# Altium PCB Ender-3.PcbDoc (part 13 of 14)
Units mil, origin at the board's own origin, x right, y up, seen from the top; angles counter-clockwise.
Board outline 3970.48 x 2769.68 mil, 2 copper layers (TopLayer, BottomLayer); 146 components, 136 nets, 669 pads, 614 vias.
Unrouted connection lines stored in the file: 1.
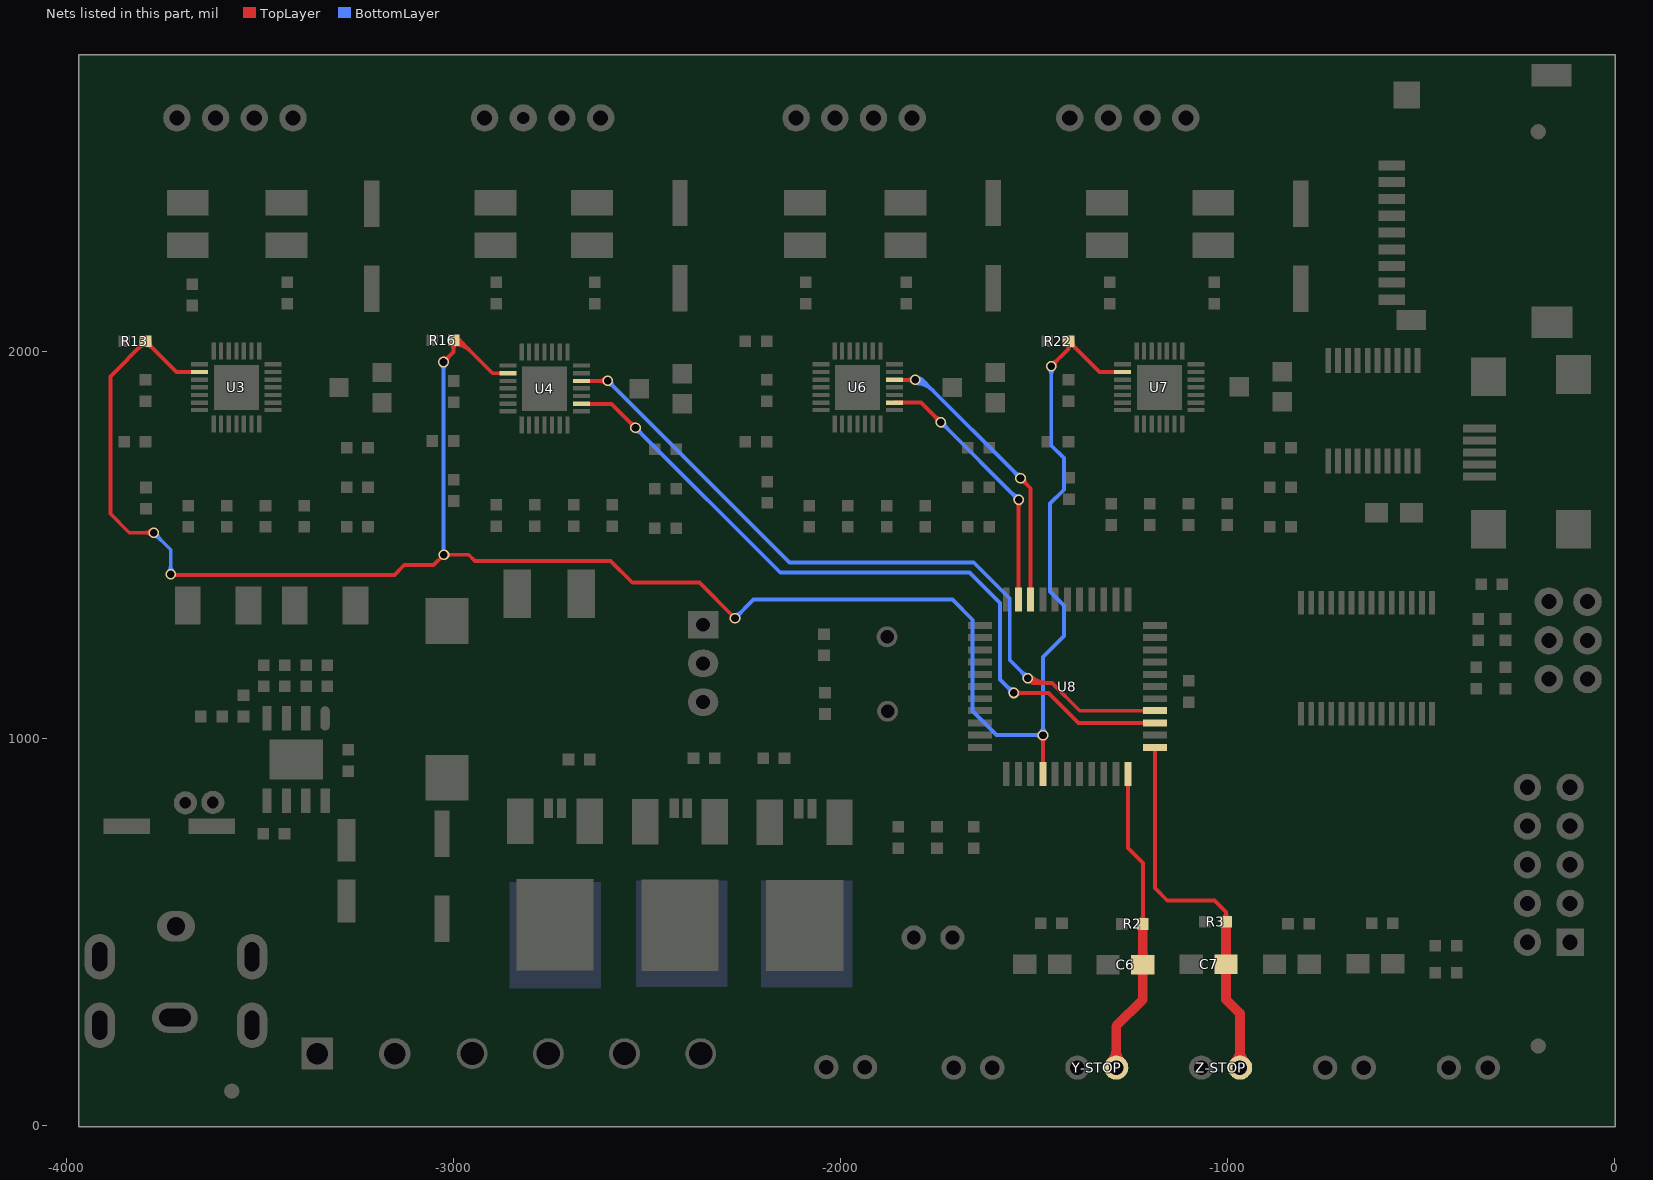
[diagram p13: the nets of this part, all layers, seen from the top]

## Via types
v1: diameter 28, hole 18, TopLayer to BottomLayer, tented both sides, 246 vias
v2: diameter 27.56, hole 19.68, TopLayer to BottomLayer, tented both sides, 196 vias
v3: diameter 20, hole 12, TopLayer to BottomLayer, tented both sides, 124 vias
v4: diameter 27.56, hole 11.81, TopLayer to BottomLayer, tented bottom, 16 vias
v5: diameter 27.56, hole 19.68, TopLayer to BottomLayer, 16 vias
v6: diameter 20, hole 12, TopLayer to BottomLayer, 12 vias
v7: diameter 28, hole 11.81, TopLayer to BottomLayer, tented both sides, 4 vias

## Nets (pads, with @x,y where several pads share a name; then routed paths per layer and width w, separated by ;. In a path a pad name is that pad's centre, name@x,y a point inside that pad or via, vN(x,y) a via of type N, cw(c..) or ccw(c..) an arc to the next point about the centre after c; other vN are vias at no path point) (continued)
XYEENABLE: R13.1 R16.1 R22.1 U3.2 U4.2 U7.2 U8.15 | length 10655.1
  TopLayer w10: v2(-3774.54,1532.84) -3837.54,1532.84 -3886.54,1581.84 -3886.54,1936.97 R13.1@-3795.62,2027.88 -3715.62,1947.88 U3.2@-3655.62,1947.88 ; v2@-3730.54,1424 -3152,1424 -3127.01,1448.99 -3051.39,1448.99 v2(-3024.54,1475.84) -2960.54,1475.84 -2944.69,1460 -2594,1460 -2537.84,1403.84 -2364.54,1403.84 v2(-2272.54,1311.84) ; v2(-3025.54,1973.84) -2999.54,1999.84 R16.1@-2999.54,2029.84 ; R16.1@-2992.9,2022.36 cw(c-2984.49,2012.89) -2975.54,2021.84 ; -2983.04,2029.35 ccw(c-2991.55,2020.84) R16.1@-2999.54,2029.84 ; U4.2@-2859.54,1944.84 -2898.54,1944.84 -2983.54,2029.84 ; U8.15@-1476.54,908.84 v2(-1476.54,1009.84) ; v2(-1455.23,1963.14) -1410.62,2007.76 ; U7.2@-1270.62,1947.88 -1330.62,1947.88 R22.1@-1410.62,2027.88 -1410.62,2007.76 ; -3812.69,2010.81 cw(c-3795.62,1993.74) R13.1@-3795.62,2017.88 ; -3812.69,2010.81 ccw(c-3829.76,2027.88) R13.1@-3805.62,2027.88 ; -3812.69,2010.81 cw(c-3795.62,1993.74) R13.1@-3795.62,2017.88 ; -3812.69,2010.81 ccw(c-3829.76,2027.88) R13.1@-3805.62,2027.88 ; -3812.69,2010.81 cw(c-3795.62,1993.74) R13.1@-3795.62,2017.88 ; -3812.69,2010.81 ccw(c-3829.76,2027.88) R13.1@-3805.62,2027.88 ; -3812.69,2010.81 cw(c-3795.62,1993.74) R13.1@-3795.62,2017.88 ; -3812.69,2010.81 ccw(c-3829.76,2027.88) R13.1@-3805.62,2027.88 ; -3812.69,2010.81 cw(c-3795.62,1993.74) R13.1@-3795.62,2017.88 ; -3812.69,2010.81 ccw(c-3829.76,2027.88) R13.1@-3805.62,2027.88 ; -3812.69,2010.81 ccw(c-3829.76,2027.88) R13.1@-3805.62,2027.88 ; -3812.69,2010.81 cw(c-3795.62,1993.74) R13.1@-3795.62,2017.88 ; -3812.69,2010.81 ccw(c-3829.76,2027.88) R13.1@-3805.62,2027.88 ; -3812.69,2010.81 cw(c-3795.62,1993.74) R13.1@-3795.62,2017.88 ; -3812.69,2010.81 ccw(c-3829.76,2027.88) R13.1@-3805.62,2027.88 ; -3812.69,2010.81 cw(c-3795.62,1993.74) R13.1@-3795.62,2017.88 ; -3812.69,2010.81 ccw(c-3829.76,2027.88) R13.1@-3805.62,2027.88 ; -3812.69,2010.81 cw(c-3795.62,1993.74) R13.1@-3795.62,2017.88 ; -3795.73,1532.84 cw(c-3795.73,1511.65) v2@-3780.74,1526.63 ; -3795.73,1532.84 ccw(c-3795.73,1554.04) v2@-3780.74,1539.05 ; -3795.73,1532.84 cw(c-3795.73,1511.65) v2@-3780.74,1526.63 ; -3795.73,1532.84 ccw(c-3795.73,1554.04) v2@-3780.74,1539.05 ; -3795.73,1532.84 cw(c-3795.73,1511.65) v2@-3780.74,1526.63 ; -3795.73,1532.84 ccw(c-3795.73,1554.04) v2@-3780.74,1539.05 ; -3795.73,1532.84 cw(c-3795.73,1511.65) v2@-3780.74,1526.63 ; -3795.73,1532.84 ccw(c-3795.73,1554.04) v2@-3780.74,1539.05 ; -3795.73,1532.84 cw(c-3795.73,1511.65) v2@-3780.74,1526.63 ; -3795.73,1532.84 ccw(c-3795.73,1554.04) v2@-3780.74,1539.05 ; -3795.73,1532.84 ccw(c-3795.73,1554.04) v2@-3780.74,1539.05 ; -3795.73,1532.84 cw(c-3795.73,1511.65) v2@-3780.74,1526.63 ; -3795.73,1532.84 ccw(c-3795.73,1554.04) v2@-3780.74,1539.05 ; -3795.73,1532.84 cw(c-3795.73,1511.65) v2@-3780.74,1526.63 ; -3795.73,1532.84 ccw(c-3795.73,1554.04) v2@-3780.74,1539.05 ; -3795.73,1532.84 cw(c-3795.73,1511.65) v2@-3780.74,1526.63 ; -3795.73,1532.84 ccw(c-3795.73,1554.04) v2@-3780.74,1539.05 ; -3795.73,1532.84 cw(c-3795.73,1511.65) v2@-3780.74,1526.63 ; R13.1@-3795.62,2017.88 cw(c-3795.62,1993.74) -3778.55,2010.81 ; R13.1@-3795.62,2017.88 cw(c-3795.62,1993.74) -3778.55,2010.81 ; R13.1@-3795.62,2017.88 cw(c-3795.62,1993.74) -3778.55,2010.81 ; R13.1@-3795.62,2017.88 cw(c-3795.62,1993.74) -3778.55,2010.81 ; R13.1@-3795.62,2017.88 cw(c-3795.62,1993.74) -3778.55,2010.81 ; R13.1@-3795.62,2017.88 cw(c-3795.62,1993.74) -3778.55,2010.81 ; R13.1@-3795.62,2017.88 cw(c-3795.62,1993.74) -3778.55,2010.81 ; R13.1@-3795.62,2017.88 cw(c-3795.62,1993.74) -3778.55,2010.81 ; R13.1@-3795.62,2017.88 cw(c-3795.62,1993.74) -3778.55,2010.81 ; R13.1@-3785.62,2027.88 ccw(c-3761.48,2027.88) -3778.55,2010.81 ; R13.1@-3785.62,2027.88 ccw(c-3761.48,2027.88) -3778.55,2010.81 ; R13.1@-3785.62,2027.88 ccw(c-3761.48,2027.88) -3778.55,2010.81 ; R13.1@-3785.62,2027.88 ccw(c-3761.48,2027.88) -3778.55,2010.81 ; R13.1@-3785.62,2027.88 ccw(c-3761.48,2027.88) -3778.55,2010.81 ; R13.1@-3785.62,2027.88 ccw(c-3761.48,2027.88) -3778.55,2010.81 ; R13.1@-3785.62,2027.88 ccw(c-3761.48,2027.88) -3778.55,2010.81 ; R13.1@-3785.62,2027.88 ccw(c-3761.48,2027.88) -3778.55,2010.81 ; R13.1@-3785.62,2027.88 ccw(c-3761.48,2027.88) -3778.55,2010.81 ; v2@-3025.54,1982.62 ccw(c-3025.54,2003.82) -3010.55,1988.83 ; v2@-3025.54,1982.62 ccw(c-3025.54,2003.82) -3010.55,1988.83 ; v2@-3025.54,1982.62 ccw(c-3025.54,2003.82) -3010.55,1988.83 ; v2@-3025.54,1982.62 ccw(c-3025.54,2003.82) -3010.55,1988.83 ; v2@-3025.54,1982.62 ccw(c-3025.54,2003.82) -3010.55,1988.83 ; v2@-3025.54,1982.62 ccw(c-3025.54,2003.82) -3010.55,1988.83 ; v2@-3025.54,1982.62 ccw(c-3025.54,2003.82) -3010.55,1988.83 ; v2@-3025.54,1982.62 ccw(c-3025.54,2003.82) -3010.55,1988.83 ; v2@-3025.54,1982.62 ccw(c-3025.54,2003.82) -3010.55,1988.83 ; v2@-3016.76,1973.84 cw(c-2995.56,1973.84) -3010.55,1988.83 ; v2@-3016.76,1973.84 cw(c-2995.56,1973.84) -3010.55,1988.83 ; v2@-3016.76,1973.84 cw(c-2995.56,1973.84) -3010.55,1988.83 ; v2@-3016.76,1973.84 cw(c-2995.56,1973.84) -3010.55,1988.83 ; v2@-3016.76,1973.84 cw(c-2995.56,1973.84) -3010.55,1988.83 ; v2@-3016.76,1973.84 cw(c-2995.56,1973.84) -3010.55,1988.83 ; v2@-3016.76,1973.84 cw(c-2995.56,1973.84) -3010.55,1988.83 ; v2@-3016.76,1973.84 cw(c-2995.56,1973.84) -3010.55,1988.83 ; v2@-3016.76,1973.84 cw(c-2995.56,1973.84) -3010.55,1988.83 ; R16.1@-3006.61,2022.77 cw(c-3023.68,2005.7) -2999.54,2005.7 ; R16.1@-3006.61,2022.77 cw(c-3023.68,2005.7) -2999.54,2005.7 ; R16.1@-3006.61,2022.77 cw(c-3023.68,2005.7) -2999.54,2005.7 ; R16.1@-3006.61,2022.77 cw(c-3023.68,2005.7) -2999.54,2005.7 ; R16.1@-3006.61,2022.77 cw(c-3023.68,2005.7) -2999.54,2005.7 ; R16.1@-3006.61,2022.77 cw(c-3023.68,2005.7) -2999.54,2005.7 ; R16.1@-3006.61,2022.77 cw(c-3023.68,2005.7) -2999.54,2005.7 ; R16.1@-3006.61,2022.77 cw(c-3023.68,2005.7) -2999.54,2005.7 ; R16.1@-3006.61,2022.77 cw(c-3023.68,2005.7) -2999.54,2005.7 ; -2999.54,2005.7 cw(c-2975.39,2005.7) R16.1@-2992.46,2022.77 ; -2999.54,2005.7 cw(c-2975.39,2005.7) R16.1@-2992.46,2022.77 ; -2999.54,2005.7 cw(c-2975.39,2005.7) R16.1@-2992.46,2022.77 ; -2999.54,2005.7 cw(c-2975.39,2005.7) R16.1@-2992.46,2022.77 ; -2999.54,2005.7 cw(c-2975.39,2005.7) R16.1@-2992.46,2022.77 ; -2999.54,2005.7 cw(c-2975.39,2005.7) R16.1@-2992.46,2022.77 ; -2999.54,2005.7 cw(c-2975.39,2005.7) R16.1@-2992.46,2022.77 ; -2999.54,2005.7 cw(c-2975.39,2005.7) R16.1@-2992.46,2022.77 ; -2999.54,2005.7 cw(c-2975.39,2005.7) R16.1@-2992.46,2022.77 ; R16.1@-2999.54,2019.84 cw(c-2999.54,1957.07) -2955.15,2001.46 ; R16.1@-2999.54,2019.84 cw(c-2999.54,1957.07) -2955.15,2001.46 ; R16.1@-2999.54,2019.84 cw(c-2999.54,1957.07) -2955.15,2001.46 ; R16.1@-2999.54,2019.84 cw(c-2999.54,1957.07) -2955.15,2001.46 ; R16.1@-2999.54,2019.84 cw(c-2999.54,1957.07) -2955.15,2001.46 ; R16.1@-2999.54,2019.84 cw(c-2999.54,1957.07) -2955.15,2001.46 ; R16.1@-2999.54,2029.84 cw(c-2999.54,1991.22) -2972.22,2018.53 ; R16.1@-2999.54,2029.84 cw(c-2999.54,1991.22) -2972.22,2018.53 ; R16.1@-2999.54,2029.84 cw(c-2999.54,1991.22) -2972.22,2018.53 ; R16.1@-2999.54,2029.84 cw(c-2999.54,1991.22) -2972.22,2018.53 ; R16.1@-2999.54,2029.84 cw(c-2999.54,1991.22) -2972.22,2018.53 ; R16.1@-2999.54,2029.84 cw(c-2999.54,1991.22) -2972.22,2018.53 ; R16.1@-2999.54,2029.84 -2983.54,2029.84 ; R16.1@-2990.55,2025.46 cw(c-2983.54,2022.04) -2983.54,2029.84 ; R16.1@-2990.55,2025.46 cw(c-2983.54,2022.04) -2983.54,2029.84 ; R16.1@-2990.55,2025.46 cw(c-2983.54,2022.04) -2983.54,2029.84 ; R16.1@-2990.55,2025.46 cw(c-2983.54,2022.04) -2983.54,2029.84 ; R16.1@-2990.55,2025.46 cw(c-2983.54,2022.04) -2983.54,2029.84 ; R16.1@-2990.55,2025.46 cw(c-2983.54,2022.04) -2983.54,2029.84 ; R16.1@-2990.55,2025.46 cw(c-2983.54,2022.04) -2983.54,2029.84 ; R16.1@-2990.55,2025.46 cw(c-2983.54,2022.04) -2983.54,2029.84 ; R16.1@-2990.55,2025.46 cw(c-2983.54,2022.04) -2983.54,2029.84 ; R16.1@-2990.55,2034.22 ccw(c-2983.54,2037.64) -2983.54,2029.84 ; R16.1@-2990.55,2034.22 ccw(c-2983.54,2037.64) -2983.54,2029.84 ; R16.1@-2990.55,2034.22 ccw(c-2983.54,2037.64) -2983.54,2029.84 ; R16.1@-2990.55,2034.22 ccw(c-2983.54,2037.64) -2983.54,2029.84 ; R16.1@-2990.55,2034.22 ccw(c-2983.54,2037.64) -2983.54,2029.84 ; R16.1@-2990.55,2034.22 ccw(c-2983.54,2037.64) -2983.54,2029.84 ; R16.1@-2990.55,2034.22 ccw(c-2983.54,2037.64) -2983.54,2029.84 ; R16.1@-2990.55,2034.22 ccw(c-2983.54,2037.64) -2983.54,2029.84 ; R16.1@-2990.55,2034.22 ccw(c-2983.54,2037.64) -2983.54,2029.84 ; U8.15@-1479.36,933.67 ccw(c-1486.19,940.5) -1476.54,940.5 ; U8.15@-1479.36,933.67 ccw(c-1486.19,940.5) -1476.54,940.5 ; U8.15@-1479.36,933.67 ccw(c-1486.19,940.5) -1476.54,940.5 ; U8.15@-1479.36,933.67 ccw(c-1486.19,940.5) -1476.54,940.5 ; U8.15@-1479.36,933.67 ccw(c-1486.19,940.5) -1476.54,940.5 ; U8.15@-1479.36,933.67 ccw(c-1486.19,940.5) -1476.54,940.5 ; -1476.54,940.5 ccw(c-1466.88,940.5) U8.15@-1473.71,933.67 ; -1476.54,940.5 ccw(c-1466.88,940.5) U8.15@-1473.71,933.67 ; -1476.54,940.5 ccw(c-1466.88,940.5) U8.15@-1473.71,933.67 ; -1476.54,940.5 ccw(c-1466.88,940.5) U8.15@-1473.71,933.67 ; -1476.54,940.5 ccw(c-1466.88,940.5) U8.15@-1473.71,933.67 ; -1476.54,940.5 ccw(c-1466.88,940.5) U8.15@-1473.71,933.67 ; -1476.54,988.65 cw(c-1455.34,988.65) -1470.33,1003.63 ccw(c-1455.34,988.65) -1476.54,988.65 ; -1476.54,988.65 ccw(c-1497.73,988.65) -1482.74,1003.63 cw(c-1497.73,988.65) -1476.54,988.65 ; v2@-1455.23,1971.92 ccw(c-1455.23,1993.12) -1440.25,1978.13 ; v2@-1455.23,1971.92 ccw(c-1455.23,1993.12) -1440.25,1978.13 ; v2@-1455.23,1971.92 ccw(c-1455.23,1993.12) -1440.25,1978.13 ; v2@-1455.23,1971.92 ccw(c-1455.23,1993.12) -1440.25,1978.13 ; v2@-1455.23,1971.92 ccw(c-1455.23,1993.12) -1440.25,1978.13 ; v2@-1455.23,1971.92 ccw(c-1455.23,1993.12) -1440.25,1978.13 ; v2@-1455.23,1971.92 ccw(c-1455.23,1993.12) -1440.25,1978.13 ; v2@-1455.23,1971.92 ccw(c-1455.23,1993.12) -1440.25,1978.13 ; v2@-1455.23,1971.92 ccw(c-1455.23,1993.12) -1440.25,1978.13 ; v2@-1446.45,1963.14 cw(c-1425.26,1963.14) -1440.25,1978.13 ; v2@-1446.45,1963.14 cw(c-1425.26,1963.14) -1440.25,1978.13 ; v2@-1446.45,1963.14 cw(c-1425.26,1963.14) -1440.25,1978.13 ; v2@-1446.45,1963.14 cw(c-1425.26,1963.14) -1440.25,1978.13 ; v2@-1446.45,1963.14 cw(c-1425.26,1963.14) -1440.25,1978.13 ; v2@-1446.45,1963.14 cw(c-1425.26,1963.14) -1440.25,1978.13 ; v2@-1446.45,1963.14 cw(c-1425.26,1963.14) -1440.25,1978.13 ; v2@-1446.45,1963.14 cw(c-1425.26,1963.14) -1440.25,1978.13 ; v2@-1446.45,1963.14 cw(c-1425.26,1963.14) -1440.25,1978.13 ; R22.1@-1416.66,2019.91 cw(c-1425.87,2007.76) -1410.62,2007.76 ; R22.1@-1416.66,2019.91 cw(c-1425.87,2007.76) -1410.62,2007.76 ; R22.1@-1416.66,2019.91 cw(c-1425.87,2007.76) -1410.62,2007.76 ; R22.1@-1416.66,2019.91 cw(c-1425.87,2007.76) -1410.62,2007.76 ; R22.1@-1416.66,2019.91 cw(c-1425.87,2007.76) -1410.62,2007.76 ; R22.1@-1416.66,2019.91 cw(c-1425.87,2007.76) -1410.62,2007.76 ; R22.1@-1416.66,2019.91 cw(c-1425.87,2007.76) -1410.62,2007.76 ; R22.1@-1416.66,2019.91 cw(c-1425.87,2007.76) -1410.62,2007.76 ; R22.1@-1416.66,2019.91 cw(c-1425.87,2007.76) -1410.62,2007.76 ; -1410.62,2007.76 cw(c-1395.37,2007.76) R22.1@-1404.58,2019.91 ; -1410.62,2007.76 cw(c-1395.37,2007.76) R22.1@-1404.58,2019.91 ; -1410.62,2007.76 cw(c-1395.37,2007.76) R22.1@-1404.58,2019.91 ; -1410.62,2007.76 cw(c-1395.37,2007.76) R22.1@-1404.58,2019.91 ; -1410.62,2007.76 cw(c-1395.37,2007.76) R22.1@-1404.58,2019.91 ; -1410.62,2007.76 cw(c-1395.37,2007.76) R22.1@-1404.58,2019.91 ; -1410.62,2007.76 cw(c-1395.37,2007.76) R22.1@-1404.58,2019.91 ; -1410.62,2007.76 cw(c-1395.37,2007.76) R22.1@-1404.58,2019.91 ; -1410.62,2007.76 cw(c-1395.37,2007.76) R22.1@-1404.58,2019.91 ; R22.1@-1410.62,2017.88 cw(c-1410.62,1993.74) -1393.55,2010.81 ; R22.1@-1410.62,2017.88 cw(c-1410.62,1993.74) -1393.55,2010.81 ; R22.1@-1410.62,2017.88 cw(c-1410.62,1993.74) -1393.55,2010.81 ; R22.1@-1410.62,2017.88 cw(c-1410.62,1993.74) -1393.55,2010.81 ; R22.1@-1410.62,2017.88 cw(c-1410.62,1993.74) -1393.55,2010.81 ; R22.1@-1410.62,2017.88 cw(c-1410.62,1993.74) -1393.55,2010.81 ; R22.1@-1410.62,2017.88 cw(c-1410.62,1993.74) -1393.55,2010.81 ; R22.1@-1410.62,2017.88 cw(c-1410.62,1993.74) -1393.55,2010.81 ; R22.1@-1410.62,2017.88 cw(c-1410.62,1993.74) -1393.55,2010.81 ; R22.1@-1400.62,2027.88 ccw(c-1376.48,2027.88) -1393.55,2010.81 ; R22.1@-1400.62,2027.88 ccw(c-1376.48,2027.88) -1393.55,2010.81 ; R22.1@-1400.62,2027.88 ccw(c-1376.48,2027.88) -1393.55,2010.81 ; R22.1@-1400.62,2027.88 ccw(c-1376.48,2027.88) -1393.55,2010.81 ; R22.1@-1400.62,2027.88 ccw(c-1376.48,2027.88) -1393.55,2010.81 ; R22.1@-1400.62,2027.88 ccw(c-1376.48,2027.88) -1393.55,2010.81 ; R22.1@-1400.62,2027.88 ccw(c-1376.48,2027.88) -1393.55,2010.81 ; R22.1@-1400.62,2027.88 ccw(c-1376.48,2027.88) -1393.55,2010.81 ; R22.1@-1400.62,2027.88 ccw(c-1376.48,2027.88) -1393.55,2010.81
  BottomLayer w10: v2(-3774.54,1532.84) -3730.54,1488.84 v2(-3730.54,1425.84) ; v2@-3025.54,1475.84 v2(-3025.54,1973.84) ; v2(-2272.54,1311.84) -2224.54,1359.84 -1710.54,1359.84 -1658.54,1307.84 -1658.54,1071.84 -1596.54,1009.84 v2(-1476.54,1009.84) -1476.54,1211.84 -1422.54,1265.84 -1422.54,1345 -1458,1380.46 -1458,1608.54 -1422.54,1644 -1422.54,1725.84 -1455.23,1758.54 v2(-1455.23,1963.14) ; v2@-3774.54,1524.06 cw(c-3774.54,1502.87) -3759.55,1517.85 ; v2@-3774.54,1524.06 cw(c-3774.54,1502.87) -3759.55,1517.85 ; v2@-3774.54,1524.06 cw(c-3774.54,1502.87) -3759.55,1517.85 ; v2@-3774.54,1524.06 cw(c-3774.54,1502.87) -3759.55,1517.85 ; v2@-3774.54,1524.06 cw(c-3774.54,1502.87) -3759.55,1517.85 ; v2@-3774.54,1524.06 cw(c-3774.54,1502.87) -3759.55,1517.85 ; v2@-3774.54,1524.06 cw(c-3774.54,1502.87) -3759.55,1517.85 ; v2@-3774.54,1524.06 cw(c-3774.54,1502.87) -3759.55,1517.85 ; v2@-3774.54,1524.06 cw(c-3774.54,1502.87) -3759.55,1517.85 ; v2@-3765.76,1532.84 ccw(c-3744.56,1532.84) -3759.55,1517.85 ; v2@-3765.76,1532.84 ccw(c-3744.56,1532.84) -3759.55,1517.85 ; v2@-3765.76,1532.84 ccw(c-3744.56,1532.84) -3759.55,1517.85 ; v2@-3765.76,1532.84 ccw(c-3744.56,1532.84) -3759.55,1517.85 ; v2@-3765.76,1532.84 ccw(c-3744.56,1532.84) -3759.55,1517.85 ; v2@-3765.76,1532.84 ccw(c-3744.56,1532.84) -3759.55,1517.85 ; v2@-3765.76,1532.84 ccw(c-3744.56,1532.84) -3759.55,1517.85 ; v2@-3765.76,1532.84 ccw(c-3744.56,1532.84) -3759.55,1517.85 ; v2@-3765.76,1532.84 ccw(c-3744.56,1532.84) -3759.55,1517.85 ; v2@-3736.74,1432.05 ccw(c-3751.73,1447.04) -3730.54,1447.04 ; v2@-3736.74,1432.05 ccw(c-3751.73,1447.04) -3730.54,1447.04 ; v2@-3736.74,1432.05 ccw(c-3751.73,1447.04) -3730.54,1447.04 ; v2@-3736.74,1432.05 ccw(c-3751.73,1447.04) -3730.54,1447.04 ; v2@-3736.74,1432.05 ccw(c-3751.73,1447.04) -3730.54,1447.04 ; v2@-3736.74,1432.05 ccw(c-3751.73,1447.04) -3730.54,1447.04 ; v2@-3736.74,1432.05 ccw(c-3751.73,1447.04) -3730.54,1447.04 ; v2@-3736.74,1432.05 ccw(c-3751.73,1447.04) -3730.54,1447.04 ; v2@-3736.74,1432.05 ccw(c-3751.73,1447.04) -3730.54,1447.04 ; -3730.54,1447.04 ccw(c-3709.34,1447.04) v2@-3724.33,1432.05 ; -3730.54,1447.04 ccw(c-3709.34,1447.04) v2@-3724.33,1432.05 ; -3730.54,1447.04 ccw(c-3709.34,1447.04) v2@-3724.33,1432.05 ; -3730.54,1447.04 ccw(c-3709.34,1447.04) v2@-3724.33,1432.05 ; -3730.54,1447.04 ccw(c-3709.34,1447.04) v2@-3724.33,1432.05 ; -3730.54,1447.04 ccw(c-3709.34,1447.04) v2@-3724.33,1432.05 ; -3730.54,1447.04 ccw(c-3709.34,1447.04) v2@-3724.33,1432.05 ; -3730.54,1447.04 ccw(c-3709.34,1447.04) v2@-3724.33,1432.05 ; -3730.54,1447.04 ccw(c-3709.34,1447.04) v2@-3724.33,1432.05 ; v2@-3031.74,1967.63 cw(c-3046.73,1952.65) -3025.54,1952.65 ; v2@-3031.74,1967.63 cw(c-3046.73,1952.65) -3025.54,1952.65 ; v2@-3031.74,1967.63 cw(c-3046.73,1952.65) -3025.54,1952.65 ; v2@-3031.74,1967.63 cw(c-3046.73,1952.65) -3025.54,1952.65 ; v2@-3031.74,1967.63 cw(c-3046.73,1952.65) -3025.54,1952.65 ; v2@-3031.74,1967.63 cw(c-3046.73,1952.65) -3025.54,1952.65 ; v2@-3031.74,1967.63 cw(c-3046.73,1952.65) -3025.54,1952.65 ; v2@-3031.74,1967.63 cw(c-3046.73,1952.65) -3025.54,1952.65 ; v2@-3031.74,1967.63 cw(c-3046.73,1952.65) -3025.54,1952.65 ; -3025.54,1952.65 cw(c-3004.34,1952.65) v2@-3019.33,1967.63 ; -3025.54,1952.65 cw(c-3004.34,1952.65) v2@-3019.33,1967.63 ; -3025.54,1952.65 cw(c-3004.34,1952.65) v2@-3019.33,1967.63 ; -3025.54,1952.65 cw(c-3004.34,1952.65) v2@-3019.33,1967.63 ; -3025.54,1952.65 cw(c-3004.34,1952.65) v2@-3019.33,1967.63 ; -3025.54,1952.65 cw(c-3004.34,1952.65) v2@-3019.33,1967.63 ; -3025.54,1952.65 cw(c-3004.34,1952.65) v2@-3019.33,1967.63 ; -3025.54,1952.65 cw(c-3004.34,1952.65) v2@-3019.33,1967.63 ; -3025.54,1952.65 cw(c-3004.34,1952.65) v2@-3019.33,1967.63 ; v2@-2272.54,1320.62 ccw(c-2272.54,1341.82) -2257.55,1326.83 ; v2@-2272.54,1320.62 ccw(c-2272.54,1341.82) -2257.55,1326.83 ; v2@-2272.54,1320.62 ccw(c-2272.54,1341.82) -2257.55,1326.83 ; v2@-2272.54,1320.62 ccw(c-2272.54,1341.82) -2257.55,1326.83 ; v2@-2272.54,1320.62 ccw(c-2272.54,1341.82) -2257.55,1326.83 ; v2@-2272.54,1320.62 ccw(c-2272.54,1341.82) -2257.55,1326.83 ; v2@-2272.54,1320.62 ccw(c-2272.54,1341.82) -2257.55,1326.83 ; v2@-2272.54,1320.62 ccw(c-2272.54,1341.82) -2257.55,1326.83 ; v2@-2272.54,1320.62 ccw(c-2272.54,1341.82) -2257.55,1326.83 ; v2@-2263.76,1311.84 cw(c-2242.56,1311.84) -2257.55,1326.83 ; v2@-2263.76,1311.84 cw(c-2242.56,1311.84) -2257.55,1326.83 ; v2@-2263.76,1311.84 cw(c-2242.56,1311.84) -2257.55,1326.83 ; v2@-2263.76,1311.84 cw(c-2242.56,1311.84) -2257.55,1326.83 ; v2@-2263.76,1311.84 cw(c-2242.56,1311.84) -2257.55,1326.83 ; v2@-2263.76,1311.84 cw(c-2242.56,1311.84) -2257.55,1326.83 ; v2@-2263.76,1311.84 cw(c-2242.56,1311.84) -2257.55,1326.83 ; v2@-2263.76,1311.84 cw(c-2242.56,1311.84) -2257.55,1326.83 ; v2@-2263.76,1311.84 cw(c-2242.56,1311.84) -2257.55,1326.83 ; -1497.73,1009.84 cw(c-1497.73,988.65) -1482.74,1003.63 ccw(c-1497.73,988.65) -1497.73,1009.84 ; -1497.73,1009.84 ccw(c-1497.73,1031.04) v2@-1482.74,1016.05 ; -1497.73,1009.84 ccw(c-1497.73,1031.04) v2@-1482.74,1016.05 ; v2@-1482.74,1016.05 ccw(c-1497.73,1031.04) -1476.54,1031.04 ; v2@-1482.74,1016.05 ccw(c-1497.73,1031.04) -1476.54,1031.04 ; -1476.54,1031.04 ccw(c-1455.34,1031.04) -1470.33,1016.05 cw(c-1455.34,1031.04) -1476.54,1031.04 ; v2@-1461.44,1956.94 cw(c-1476.43,1941.95) -1455.23,1941.95 ; v2@-1461.44,1956.94 cw(c-1476.43,1941.95) -1455.23,1941.95 ; v2@-1461.44,1956.94 cw(c-1476.43,1941.95) -1455.23,1941.95 ; v2@-1461.44,1956.94 cw(c-1476.43,1941.95) -1455.23,1941.95 ; v2@-1461.44,1956.94 cw(c-1476.43,1941.95) -1455.23,1941.95 ; v2@-1461.44,1956.94 cw(c-1476.43,1941.95) -1455.23,1941.95 ; v2@-1461.44,1956.94 cw(c-1476.43,1941.95) -1455.23,1941.95 ; v2@-1461.44,1956.94 cw(c-1476.43,1941.95) -1455.23,1941.95 ; v2@-1461.44,1956.94 cw(c-1476.43,1941.95) -1455.23,1941.95 ; -1455.23,1941.95 cw(c-1434.04,1941.95) v2@-1449.03,1956.94 ; -1455.23,1941.95 cw(c-1434.04,1941.95) v2@-1449.03,1956.94 ; -1455.23,1941.95 cw(c-1434.04,1941.95) v2@-1449.03,1956.94 ; -1455.23,1941.95 cw(c-1434.04,1941.95) v2@-1449.03,1956.94 ; -1455.23,1941.95 cw(c-1434.04,1941.95) v2@-1449.03,1956.94 ; -1455.23,1941.95 cw(c-1434.04,1941.95) v2@-1449.03,1956.94 ; -1455.23,1941.95 cw(c-1434.04,1941.95) v2@-1449.03,1956.94 ; -1455.23,1941.95 cw(c-1434.04,1941.95) v2@-1449.03,1956.94 ; -1455.23,1941.95 cw(c-1434.04,1941.95) v2@-1449.03,1956.94
Y-DIR: U4.19 U8.26 | length 3540.4
  TopLayer w10: U4.19@-2669.54,1924.84 v2@-2601.54,1924.84 ; v2@-1505.54,1156.84 v2(-1515.54,1156.84) -1503.54,1144.84 ; U8.26@-1187.54,1072.84 -1381.54,1072.84 -1453.54,1144.84 -1503.54,1144.84 ; -2625.15,1924.84 ccw(c-2625.15,1949.45) v2@-2607.74,1932.05 ; -2625.15,1924.84 ccw(c-2625.15,1949.45) v2@-2607.74,1932.05 ; -2625.15,1924.84 ccw(c-2625.15,1949.45) v2@-2607.74,1932.05 ; -2625.15,1924.84 ccw(c-2625.15,1949.45) v2@-2607.74,1932.05 ; -2625.15,1924.84 ccw(c-2625.15,1949.45) v2@-2607.74,1932.05 ; -2625.15,1924.84 ccw(c-2625.15,1949.45) v2@-2607.74,1932.05 ; -2625.15,1924.84 ccw(c-2625.15,1949.45) v2@-2607.74,1932.05 ; -2620.32,1924.84 cw(c-2620.32,1907.06) v2@-2607.74,1919.63 ; -2620.32,1924.84 cw(c-2620.32,1907.06) v2@-2607.74,1919.63 ; -2620.32,1924.84 cw(c-2620.32,1907.06) v2@-2607.74,1919.63 ; -2620.32,1924.84 cw(c-2620.32,1907.06) v2@-2607.74,1919.63 ; -2620.32,1924.84 cw(c-2620.32,1907.06) v2@-2607.74,1919.63 ; -2620.32,1924.84 cw(c-2620.32,1907.06) v2@-2607.74,1919.63 ; -2620.32,1924.84 cw(c-2620.32,1907.06) v2@-2607.74,1919.63 ; v2@-1516.4,1155.98 ccw(c-1489.51,1182.87) -1489.51,1144.84 ; v2@-1516.4,1155.98 ccw(c-1489.51,1182.87) -1489.51,1144.84 ; v2@-1516.4,1155.98 ccw(c-1489.51,1182.87) -1489.51,1144.84 ; v2@-1516.4,1155.98 ccw(c-1489.51,1182.87) -1489.51,1144.84 ; v2@-1516.4,1155.98 ccw(c-1489.51,1182.87) -1489.51,1144.84 ; v2@-1516.4,1155.98 ccw(c-1489.51,1182.87) -1489.51,1144.84 ; v2@-1514.05,1148.19 cw(c-1512.03,1136.35) -1503.54,1144.84 ; v2@-1514.05,1148.19 cw(c-1512.03,1136.35) -1503.54,1144.84 ; v2@-1514.05,1148.19 cw(c-1512.03,1136.35) -1503.54,1144.84 ; v2@-1514.05,1148.19 cw(c-1512.03,1136.35) -1503.54,1144.84 ; v2@-1514.05,1148.19 cw(c-1512.03,1136.35) -1503.54,1144.84 ; v2@-1514.05,1148.19 cw(c-1512.03,1136.35) -1503.54,1144.84 ; v2@-1514.05,1148.19 cw(c-1512.03,1136.35) -1503.54,1144.84 ; v2@-1514.05,1148.19 cw(c-1512.03,1136.35) -1503.54,1144.84 ; v2@-1514.05,1148.19 cw(c-1512.03,1136.35) -1503.54,1144.84 ; v2@-1509.33,1163.05 ccw(c-1465.37,1207.01) -1465.37,1144.84 ; v2@-1509.33,1163.05 ccw(c-1465.37,1207.01) -1465.37,1144.84 ; v2@-1509.33,1163.05 ccw(c-1465.37,1207.01) -1465.37,1144.84 ; v2@-1509.33,1163.05 ccw(c-1465.37,1207.01) -1465.37,1144.84 ; v2@-1509.33,1163.05 ccw(c-1465.37,1207.01) -1465.37,1144.84 ; v2@-1509.33,1163.05 ccw(c-1465.37,1207.01) -1465.37,1144.84 ; v2@-1506.88,1155.36 ccw(c-1495.04,1153.34) -1503.54,1144.84 ; v2@-1506.88,1155.36 ccw(c-1495.04,1153.34) -1503.54,1144.84 ; v2@-1506.88,1155.36 ccw(c-1495.04,1153.34) -1503.54,1144.84 ; v2@-1506.88,1155.36 ccw(c-1495.04,1153.34) -1503.54,1144.84 ; v2@-1506.88,1155.36 ccw(c-1495.04,1153.34) -1503.54,1144.84 ; v2@-1506.88,1155.36 ccw(c-1495.04,1153.34) -1503.54,1144.84 ; v2@-1506.88,1155.36 ccw(c-1495.04,1153.34) -1503.54,1144.84 ; v2@-1506.88,1155.36 ccw(c-1495.04,1153.34) -1503.54,1144.84 ; v2@-1506.88,1155.36 ccw(c-1495.04,1153.34) -1503.54,1144.84 ; -1219.19,1072.84 cw(c-1219.19,1063.19) U8.26@-1212.36,1070.02 ; -1219.19,1072.84 ccw(c-1219.19,1082.5) U8.26@-1212.36,1075.67 ; -1219.19,1072.84 cw(c-1219.19,1063.19) U8.26@-1212.36,1070.02 ; -1219.19,1072.84 ccw(c-1219.19,1082.5) U8.26@-1212.36,1075.67 ; -1219.19,1072.84 cw(c-1219.19,1063.19) U8.26@-1212.36,1070.02 ; -1219.19,1072.84 ccw(c-1219.19,1082.5) U8.26@-1212.36,1075.67 ; -1219.19,1072.84 ccw(c-1219.19,1082.5) U8.26@-1212.36,1075.67 ; -1219.19,1072.84 cw(c-1219.19,1063.19) U8.26@-1212.36,1070.02 ; -1219.19,1072.84 ccw(c-1219.19,1082.5) U8.26@-1212.36,1075.67 ; -1219.19,1072.84 cw(c-1219.19,1063.19) U8.26@-1212.36,1070.02 ; -1219.19,1072.84 ccw(c-1219.19,1082.5) U8.26@-1212.36,1075.67 ; -1219.19,1072.84 cw(c-1219.19,1063.19) U8.26@-1212.36,1070.02
  BottomLayer w10: v2(-2601.54,1925.84) -2131.54,1455.84 -1655.54,1455.84 -1562.54,1362.84 -1562.54,1203.84 v2(-1515.54,1156.84) ; v2@-2601.54,1917.06 cw(c-2601.54,1895.87) -2586.55,1910.85 ; v2@-2601.54,1917.06 cw(c-2601.54,1895.87) -2586.55,1910.85 ; v2@-2601.54,1917.06 cw(c-2601.54,1895.87) -2586.55,1910.85 ; v2@-2601.54,1917.06 cw(c-2601.54,1895.87) -2586.55,1910.85 ; v2@-2601.54,1917.06 cw(c-2601.54,1895.87) -2586.55,1910.85 ; v2@-2601.54,1917.06 cw(c-2601.54,1895.87) -2586.55,1910.85 ; v2@-2601.54,1917.06 cw(c-2601.54,1895.87) -2586.55,1910.85 ; v2@-2601.54,1917.06 cw(c-2601.54,1895.87) -2586.55,1910.85 ; v2@-2601.54,1917.06 cw(c-2601.54,1895.87) -2586.55,1910.85 ; v2@-2592.76,1925.84 ccw(c-2571.56,1925.84) -2586.55,1910.85 ; v2@-2592.76,1925.84 ccw(c-2571.56,1925.84) -2586.55,1910.85 ; v2@-2592.76,1925.84 ccw(c-2571.56,1925.84) -2586.55,1910.85 ; v2@-2592.76,1925.84 ccw(c-2571.56,1925.84) -2586.55,1910.85 ; v2@-2592.76,1925.84 ccw(c-2571.56,1925.84) -2586.55,1910.85 ; v2@-2592.76,1925.84 ccw(c-2571.56,1925.84) -2586.55,1910.85 ; v2@-2592.76,1925.84 ccw(c-2571.56,1925.84) -2586.55,1910.85 ; v2@-2592.76,1925.84 ccw(c-2571.56,1925.84) -2586.55,1910.85 ; v2@-2592.76,1925.84 ccw(c-2571.56,1925.84) -2586.55,1910.85 ; -1530.52,1171.83 cw(c-1545.51,1156.84) v2@-1524.31,1156.84 ; -1530.52,1171.83 ccw(c-1515.54,1186.82) v2@-1515.54,1165.62 ; -1530.52,1171.83 cw(c-1545.51,1156.84) v2@-1524.31,1156.84 ; -1530.52,1171.83 ccw(c-1515.54,1186.82) v2@-1515.54,1165.62 ; -1530.52,1171.83 cw(c-1545.51,1156.84) v2@-1524.31,1156.84 ; -1530.52,1171.83 ccw(c-1515.54,1186.82) v2@-1515.54,1165.62 ; -1530.52,1171.83 cw(c-1545.51,1156.84) v2@-1524.31,1156.84 ; -1530.52,1171.83 ccw(c-1515.54,1186.82) v2@-1515.54,1165.62 ; -1530.52,1171.83 cw(c-1545.51,1156.84) v2@-1524.31,1156.84 ; -1530.52,1171.83 ccw(c-1515.54,1186.82) v2@-1515.54,1165.62 ; -1530.52,1171.83 ccw(c-1515.54,1186.82) v2@-1515.54,1165.62 ; -1530.52,1171.83 cw(c-1545.51,1156.84) v2@-1524.31,1156.84 ; -1530.52,1171.83 ccw(c-1515.54,1186.82) v2@-1515.54,1165.62 ; -1530.52,1171.83 cw(c-1545.51,1156.84) v2@-1524.31,1156.84 ; -1530.52,1171.83 ccw(c-1515.54,1186.82) v2@-1515.54,1165.62 ; -1530.52,1171.83 cw(c-1545.51,1156.84) v2@-1524.31,1156.84 ; -1530.52,1171.83 ccw(c-1515.54,1186.82) v2@-1515.54,1165.62 ; -1530.52,1171.83 cw(c-1545.51,1156.84) v2@-1524.31,1156.84
Y-STEP: U4.16 U8.25 | length 3228.7
  TopLayer w10: U4.16@-2669.54,1865.84 -2591.54,1865.84 v2(-2529.54,1803.84) ; v2(-1552.54,1118.84) -1462.54,1118.84 -1384.54,1040.84 U8.25@-1187.54,1040.84 ; -2544.52,1818.83 cw(c-2559.51,1803.84) v2@-2538.31,1803.84 ; -2544.52,1818.83 ccw(c-2529.54,1833.82) v2@-2529.54,1812.62 ; -2544.52,1818.83 cw(c-2559.51,1803.84) v2@-2538.31,1803.84 ; -2544.52,1818.83 ccw(c-2529.54,1833.82) v2@-2529.54,1812.62 ; -2544.52,1818.83 cw(c-2559.51,1803.84) v2@-2538.31,1803.84 ; -2544.52,1818.83 ccw(c-2529.54,1833.82) v2@-2529.54,1812.62 ; -2544.52,1818.83 cw(c-2559.51,1803.84) v2@-2538.31,1803.84 ; -2544.52,1818.83 ccw(c-2529.54,1833.82) v2@-2529.54,1812.62 ; -2544.52,1818.83 cw(c-2559.51,1803.84) v2@-2538.31,1803.84 ; -2544.52,1818.83 ccw(c-2529.54,1833.82) v2@-2529.54,1812.62 ; -2544.52,1818.83 ccw(c-2529.54,1833.82) v2@-2529.54,1812.62 ; -2544.52,1818.83 cw(c-2559.51,1803.84) v2@-2538.31,1803.84 ; -2544.52,1818.83 ccw(c-2529.54,1833.82) v2@-2529.54,1812.62 ; -2544.52,1818.83 cw(c-2559.51,1803.84) v2@-2538.31,1803.84 ; -2544.52,1818.83 ccw(c-2529.54,1833.82) v2@-2529.54,1812.62 ; -2544.52,1818.83 cw(c-2559.51,1803.84) v2@-2538.31,1803.84 ; -2544.52,1818.83 ccw(c-2529.54,1833.82) v2@-2529.54,1812.62 ; -2544.52,1818.83 cw(c-2559.51,1803.84) v2@-2538.31,1803.84 ; v2@-1546.33,1112.63 cw(c-1531.34,1097.65) -1531.34,1118.84 ; v2@-1546.33,1112.63 cw(c-1531.34,1097.65) -1531.34,1118.84 ; v2@-1546.33,1112.63 cw(c-1531.34,1097.65) -1531.34,1118.84 ; v2@-1546.33,1112.63 cw(c-1531.34,1097.65) -1531.34,1118.84 ; v2@-1546.33,1112.63 cw(c-1531.34,1097.65) -1531.34,1118.84 ; v2@-1546.33,1112.63 cw(c-1531.34,1097.65) -1531.34,1118.84 ; v2@-1546.33,1112.63 cw(c-1531.34,1097.65) -1531.34,1118.84 ; v2@-1546.33,1112.63 cw(c-1531.34,1097.65) -1531.34,1118.84 ; v2@-1546.33,1112.63 cw(c-1531.34,1097.65) -1531.34,1118.84 ; v2@-1546.33,1125.05 ccw(c-1531.34,1140.04) -1531.34,1118.84 ; v2@-1546.33,1125.05 ccw(c-1531.34,1140.04) -1531.34,1118.84 ; v2@-1546.33,1125.05 ccw(c-1531.34,1140.04) -1531.34,1118.84 ; v2@-1546.33,1125.05 ccw(c-1531.34,1140.04) -1531.34,1118.84 ; v2@-1546.33,1125.05 ccw(c-1531.34,1140.04) -1531.34,1118.84 ; v2@-1546.33,1125.05 ccw(c-1531.34,1140.04) -1531.34,1118.84 ; v2@-1546.33,1125.05 ccw(c-1531.34,1140.04) -1531.34,1118.84 ; v2@-1546.33,1125.05 ccw(c-1531.34,1140.04) -1531.34,1118.84 ; v2@-1546.33,1125.05 ccw(c-1531.34,1140.04) -1531.34,1118.84 ; -1219.19,1040.84 cw(c-1219.19,1031.19) U8.25@-1212.36,1038.01 ; -1219.19,1040.84 ccw(c-1219.19,1050.5) U8.25@-1212.36,1043.67 ; -1219.19,1040.84 cw(c-1219.19,1031.19) U8.25@-1212.36,1038.01 ; -1219.19,1040.84 ccw(c-1219.19,1050.5) U8.25@-1212.36,1043.67 ; -1219.19,1040.84 cw(c-1219.19,1031.19) U8.25@-1212.36,1038.01 ; -1219.19,1040.84 ccw(c-1219.19,1050.5) U8.25@-1212.36,1043.67 ; -1219.19,1040.84 ccw(c-1219.19,1050.5) U8.25@-1212.36,1043.67 ; -1219.19,1040.84 cw(c-1219.19,1031.19) U8.25@-1212.36,1038.01 ; -1219.19,1040.84 ccw(c-1219.19,1050.5) U8.25@-1212.36,1043.67 ; -1219.19,1040.84 cw(c-1219.19,1031.19) U8.25@-1212.36,1038.01 ; -1219.19,1040.84 ccw(c-1219.19,1050.5) U8.25@-1212.36,1043.67 ; -1219.19,1040.84 cw(c-1219.19,1031.19) U8.25@-1212.36,1038.01
  BottomLayer w10: v2(-2529.54,1803.84) -2155.54,1429.84 -1666.54,1429.84 -1587.54,1350.84 -1587.54,1153.84 v2(-1552.54,1118.84) ; v2@-2529.54,1795.06 cw(c-2529.54,1773.87) -2514.55,1788.85 ; v2@-2529.54,1795.06 cw(c-2529.54,1773.87) -2514.55,1788.85 ; v2@-2529.54,1795.06 cw(c-2529.54,1773.87) -2514.55,1788.85 ; v2@-2529.54,1795.06 cw(c-2529.54,1773.87) -2514.55,1788.85 ; v2@-2529.54,1795.06 cw(c-2529.54,1773.87) -2514.55,1788.85 ; v2@-2529.54,1795.06 cw(c-2529.54,1773.87) -2514.55,1788.85 ; v2@-2529.54,1795.06 cw(c-2529.54,1773.87) -2514.55,1788.85 ; v2@-2529.54,1795.06 cw(c-2529.54,1773.87) -2514.55,1788.85 ; v2@-2529.54,1795.06 cw(c-2529.54,1773.87) -2514.55,1788.85 ; v2@-2520.76,1803.84 ccw(c-2499.56,1803.84) -2514.55,1788.85 ; v2@-2520.76,1803.84 ccw(c-2499.56,1803.84) -2514.55,1788.85 ; v2@-2520.76,1803.84 ccw(c-2499.56,1803.84) -2514.55,1788.85 ; v2@-2520.76,1803.84 ccw(c-2499.56,1803.84) -2514.55,1788.85 ; v2@-2520.76,1803.84 ccw(c-2499.56,1803.84) -2514.55,1788.85 ; v2@-2520.76,1803.84 ccw(c-2499.56,1803.84) -2514.55,1788.85 ; v2@-2520.76,1803.84 ccw(c-2499.56,1803.84) -2514.55,1788.85 ; v2@-2520.76,1803.84 ccw(c-2499.56,1803.84) -2514.55,1788.85 ; v2@-2520.76,1803.84 ccw(c-2499.56,1803.84) -2514.55,1788.85 ; -1567.52,1133.83 cw(c-1582.51,1118.84) v2@-1561.31,1118.84 ; -1567.52,1133.83 ccw(c-1552.54,1148.82) v2@-1552.54,1127.62 ; -1567.52,1133.83 cw(c-1582.51,1118.84) v2@-1561.31,1118.84 ; -1567.52,1133.83 ccw(c-1552.54,1148.82) v2@-1552.54,1127.62 ; -1567.52,1133.83 cw(c-1582.51,1118.84) v2@-1561.31,1118.84 ; -1567.52,1133.83 ccw(c-1552.54,1148.82) v2@-1552.54,1127.62 ; -1567.52,1133.83 cw(c-1582.51,1118.84) v2@-1561.31,1118.84 ; -1567.52,1133.83 ccw(c-1552.54,1148.82) v2@-1552.54,1127.62 ; -1567.52,1133.83 cw(c-1582.51,1118.84) v2@-1561.31,1118.84 ; -1567.52,1133.83 ccw(c-1552.54,1148.82) v2@-1552.54,1127.62 ; -1567.52,1133.83 ccw(c-1552.54,1148.82) v2@-1552.54,1127.62 ; -1567.52,1133.83 cw(c-1582.51,1118.84) v2@-1561.31,1118.84 ; -1567.52,1133.83 ccw(c-1552.54,1148.82) v2@-1552.54,1127.62 ; -1567.52,1133.83 cw(c-1582.51,1118.84) v2@-1561.31,1118.84 ; -1567.52,1133.83 ccw(c-1552.54,1148.82) v2@-1552.54,1127.62 ; -1567.52,1133.83 cw(c-1582.51,1118.84) v2@-1561.31,1118.84 ; -1567.52,1133.83 ccw(c-1552.54,1148.82) v2@-1552.54,1127.62 ; -1567.52,1133.83 cw(c-1582.51,1118.84) v2@-1561.31,1118.84
Y-STOP: C6.1 R2.1 U8.22 Y-STOP.1 | length 1685.8
  TopLayer w10: U8.22@-1256.54,908.84 -1256.54,717.84 -1218.54,679.84 R2.1@-1218.54,521.84 ; R2.1@-1225.61,514.77 cw(c-1242.68,497.7) -1218.54,497.7 cw(c-1194.39,497.7) R2.1@-1211.46,514.77 ; R2.1@-1225.61,528.91 ccw(c-1242.68,545.98) -1218.54,545.98 ccw(c-1194.39,545.98) R2.1@-1211.46,528.91 ; U8.22@-1259.36,884.01 cw(c-1266.19,877.19) -1256.54,877.19 ; U8.22@-1259.36,884.01 cw(c-1266.19,877.19) -1256.54,877.19 ; U8.22@-1259.36,884.01 cw(c-1266.19,877.19) -1256.54,877.19 ; U8.22@-1259.36,884.01 cw(c-1266.19,877.19) -1256.54,877.19 ; U8.22@-1259.36,884.01 cw(c-1266.19,877.19) -1256.54,877.19 ; U8.22@-1259.36,884.01 cw(c-1266.19,877.19) -1256.54,877.19 ; -1256.54,877.19 cw(c-1246.88,877.19) U8.22@-1253.71,884.01 ; -1256.54,877.19 cw(c-1246.88,877.19) U8.22@-1253.71,884.01 ; -1256.54,877.19 cw(c-1246.88,877.19) U8.22@-1253.71,884.01 ; -1256.54,877.19 cw(c-1246.88,877.19) U8.22@-1253.71,884.01 ; -1256.54,877.19 cw(c-1246.88,877.19) U8.22@-1253.71,884.01 ; -1256.54,877.19 cw(c-1246.88,877.19) U8.22@-1253.71,884.01
  TopLayer w25: Y-STOP.1@-1287.54,150.84 -1287.54,257.84 -1218.54,326.84 C6.1@-1218.54,416.84 R2.1@-1218.54,521.84 ; Y-STOP.1@-1300.97,164.27 ccw(c-1333.4,196.7) -1287.54,196.7 ; Y-STOP.1@-1300.97,164.27 ccw(c-1333.4,196.7) -1287.54,196.7 ; Y-STOP.1@-1300.97,164.27 ccw(c-1333.4,196.7) -1287.54,196.7 ; Y-STOP.1@-1300.97,164.27 ccw(c-1333.4,196.7) -1287.54,196.7 ; Y-STOP.1@-1300.97,164.27 ccw(c-1333.4,196.7) -1287.54,196.7 ; Y-STOP.1@-1300.97,164.27 ccw(c-1333.4,196.7) -1287.54,196.7 ; -1287.54,196.7 ccw(c-1241.67,196.7) Y-STOP.1@-1274.1,164.27 ; -1287.54,196.7 ccw(c-1241.67,196.7) Y-STOP.1@-1274.1,164.27 ; -1287.54,196.7 ccw(c-1241.67,196.7) Y-STOP.1@-1274.1,164.27 ; -1287.54,196.7 ccw(c-1241.67,196.7) Y-STOP.1@-1274.1,164.27 ; -1287.54,196.7 ccw(c-1241.67,196.7) Y-STOP.1@-1274.1,164.27 ; -1287.54,196.7 ccw(c-1241.67,196.7) Y-STOP.1@-1274.1,164.27 ; C6.1@-1227.37,425.68 ccw(c-1248.71,447.02) -1218.54,447.02 ; C6.1@-1227.37,425.68 ccw(c-1248.71,447.02) -1218.54,447.02 ; C6.1@-1227.37,425.68 ccw(c-1248.71,447.02) -1218.54,447.02 ; C6.1@-1227.37,425.68 ccw(c-1248.71,447.02) -1218.54,447.02 ; C6.1@-1227.37,425.68 ccw(c-1248.71,447.02) -1218.54,447.02 ; C6.1@-1227.37,425.68 ccw(c-1248.71,447.02) -1218.54,447.02 ; -1218.54,447.02 ccw(c-1188.36,447.02) C6.1@-1209.7,425.68 ; -1218.54,447.02 ccw(c-1188.36,447.02) C6.1@-1209.7,425.68 ; -1218.54,447.02 ccw(c-1188.36,447.02) C6.1@-1209.7,425.68 ; -1218.54,447.02 ccw(c-1188.36,447.02) C6.1@-1209.7,425.68 ; -1218.54,447.02 ccw(c-1188.36,447.02) C6.1@-1209.7,425.68 ; -1218.54,447.02 ccw(c-1188.36,447.02) C6.1@-1209.7,425.68
Z-DIR: U6.19 U8.42 | length 2658.6
  TopLayer w10: U6.19@-1860.62,1927.88 v2(-1806.5,1927.88) ; v2(-1534.54,1673.84) -1508.54,1647.84 U8.42@-1508.54,1360.84 ; -1827.69,1927.88 cw(c-1827.69,1906.69) v2@-1812.7,1921.67 ; -1827.69,1927.88 ccw(c-1827.69,1949.08) v2@-1812.7,1934.09 ; -1827.69,1927.88 cw(c-1827.69,1906.69) v2@-1812.7,1921.67 ; -1827.69,1927.88 ccw(c-1827.69,1949.08) v2@-1812.7,1934.09 ; -1827.69,1927.88 cw(c-1827.69,1906.69) v2@-1812.7,1921.67 ; -1827.69,1927.88 ccw(c-1827.69,1949.08) v2@-1812.7,1934.09 ; -1827.69,1927.88 ccw(c-1827.69,1949.08) v2@-1812.7,1934.09 ; -1827.69,1927.88 cw(c-1827.69,1906.69) v2@-1812.7,1921.67 ; -1827.69,1927.88 ccw(c-1827.69,1949.08) v2@-1812.7,1934.09 ; -1827.69,1927.88 cw(c-1827.69,1906.69) v2@-1812.7,1921.67 ; -1827.69,1927.88 ccw(c-1827.69,1949.08) v2@-1812.7,1934.09 ; -1827.69,1927.88 cw(c-1827.69,1906.69) v2@-1812.7,1921.67 ; v2@-1534.54,1665.06 cw(c-1534.54,1643.87) -1519.55,1658.85 ; v2@-1534.54,1665.06 cw(c-1534.54,1643.87) -1519.55,1658.85 ; v2@-1534.54,1665.06 cw(c-1534.54,1643.87) -1519.55,1658.85 ; v2@-1534.54,1665.06 cw(c-1534.54,1643.87) -1519.55,1658.85 ; v2@-1534.54,1665.06 cw(c-1534.54,1643.87) -1519.55,1658.85 ; v2@-1534.54,1665.06 cw(c-1534.54,1643.87) -1519.55,1658.85 ; v2@-1534.54,1665.06 cw(c-1534.54,1643.87) -1519.55,1658.85 ; v2@-1534.54,1665.06 cw(c-1534.54,1643.87) -1519.55,1658.85 ; v2@-1534.54,1665.06 cw(c-1534.54,1643.87) -1519.55,1658.85 ; v2@-1525.76,1673.84 ccw(c-1504.56,1673.84) -1519.55,1658.85 ; v2@-1525.76,1673.84 ccw(c-1504.56,1673.84) -1519.55,1658.85 ; v2@-1525.76,1673.84 ccw(c-1504.56,1673.84) -1519.55,1658.85 ; v2@-1525.76,1673.84 ccw(c-1504.56,1673.84) -1519.55,1658.85 ; v2@-1525.76,1673.84 ccw(c-1504.56,1673.84) -1519.55,1658.85 ; v2@-1525.76,1673.84 ccw(c-1504.56,1673.84) -1519.55,1658.85 ; v2@-1525.76,1673.84 ccw(c-1504.56,1673.84) -1519.55,1658.85 ; v2@-1525.76,1673.84 ccw(c-1504.56,1673.84) -1519.55,1658.85 ; v2@-1525.76,1673.84 ccw(c-1504.56,1673.84) -1519.55,1658.85 ; U8.42@-1511.36,1385.67 ccw(c-1518.19,1392.5) -1508.54,1392.5 ; U8.42@-1511.36,1385.67 ccw(c-1518.19,1392.5) -1508.54,1392.5 ; U8.42@-1511.36,1385.67 ccw(c-1518.19,1392.5) -1508.54,1392.5 ; U8.42@-1511.36,1385.67 ccw(c-1518.19,1392.5) -1508.54,1392.5 ; U8.42@-1511.36,1385.67 ccw(c-1518.19,1392.5) -1508.54,1392.5 ; U8.42@-1511.36,1385.67 ccw(c-1518.19,1392.5) -1508.54,1392.5 ; -1508.54,1392.5 ccw(c-1498.88,1392.5) U8.42@-1505.71,1385.67 ; -1508.54,1392.5 ccw(c-1498.88,1392.5) U8.42@-1505.71,1385.67 ; -1508.54,1392.5 ccw(c-1498.88,1392.5) U8.42@-1505.71,1385.67 ; -1508.54,1392.5 ccw(c-1498.88,1392.5) U8.42@-1505.71,1385.67 ; -1508.54,1392.5 ccw(c-1498.88,1392.5) U8.42@-1505.71,1385.67 ; -1508.54,1392.5 ccw(c-1498.88,1392.5) U8.42@-1505.71,1385.67
  BottomLayer w10: v2@-1807.21,1928.88 cw(c-1798.53,1916.71) -1787.97,1927.27 ; v2(-1806.5,1927.88) -1788.57,1927.88 ; v2@-1801.4,1920.73 cw(c-1791.58,1906.96) -1779.61,1918.92 ; v2(-1534.54,1673.84) -1788.57,1927.88 ; v2@-1806.5,1919.1 cw(c-1806.5,1854.64) -1760.91,1900.22 ; v2@-1806.5,1919.1 cw(c-1806.5,1854.64) -1760.91,1900.22 ; v2@-1806.5,1919.1 cw(c-1806.5,1854.64) -1760.91,1900.22 ; v2@-1806.5,1919.1 cw(c-1806.5,1854.64) -1760.91,1900.22 ; v2@-1806.5,1919.1 cw(c-1806.5,1854.64) -1760.91,1900.22 ; v2@-1806.5,1919.1 cw(c-1806.5,1854.64) -1760.91,1900.22 ; v2@-1806.5,1919.1 cw(c-1806.5,1854.64) -1760.91,1900.22 ; v2@-1806.5,1919.1 cw(c-1806.5,1854.64) -1760.91,1900.22 ; v2@-1806.5,1919.1 cw(c-1806.5,1854.64) -1760.91,1900.22 ; v2@-1806.5,1929.1 cw(c-1806.5,1888.78) -1777.98,1917.29 ; v2@-1806.5,1929.1 cw(c-1806.5,1888.78) -1777.98,1917.29 ; v2@-1806.5,1929.1 cw(c-1806.5,1888.78) -1777.98,1917.29 ; v2@-1806.5,1929.1 cw(c-1806.5,1888.78) -1777.98,1917.29 ; v2@-1806.5,1929.1 cw(c-1806.5,1888.78) -1777.98,1917.29 ; v2@-1806.5,1929.1 cw(c-1806.5,1888.78) -1777.98,1917.29 ; v2@-1806.5,1929.1 cw(c-1806.5,1888.78) -1777.98,1917.29 ; v2@-1806.5,1929.1 cw(c-1806.5,1888.78) -1777.98,1917.29 ; v2@-1806.5,1929.1 cw(c-1806.5,1888.78) -1777.98,1917.29 ; v2@-1799.56,1922.5 cw(c-1788.58,1913.98) -1788.58,1927.88 ; v2@-1799.56,1922.5 cw(c-1788.58,1913.98) -1788.58,1927.88 ; v2@-1799.56,1922.5 cw(c-1788.58,1913.98) -1788.58,1927.88 ; v2@-1799.56,1922.5 cw(c-1788.58,1913.98) -1788.58,1927.88 ; v2@-1799.56,1922.5 cw(c-1788.58,1913.98) -1788.58,1927.88 ; v2@-1799.56,1922.5 cw(c-1788.58,1913.98) -1788.58,1927.88 ; v2@-1799.56,1922.5 cw(c-1788.58,1913.98) -1788.58,1927.88 ; v2@-1799.56,1922.5 cw(c-1788.58,1913.98) -1788.58,1927.88 ; v2@-1799.56,1922.5 cw(c-1788.58,1913.98) -1788.58,1927.88 ; v2@-1799.56,1933.26 ccw(c-1788.58,1941.78) -1788.58,1927.88 ; v2@-1799.56,1933.26 ccw(c-1788.58,1941.78) -1788.58,1927.88 ; v2@-1799.56,1933.26 ccw(c-1788.58,1941.78) -1788.58,1927.88 ; v2@-1799.56,1933.26 ccw(c-1788.58,1941.78) -1788.58,1927.88 ; v2@-1799.56,1933.26 ccw(c-1788.58,1941.78) -1788.58,1927.88 ; v2@-1799.56,1933.26 ccw(c-1788.58,1941.78) -1788.58,1927.88 ; v2@-1799.56,1933.26 ccw(c-1788.58,1941.78) -1788.58,1927.88 ; v2@-1799.56,1933.26 ccw(c-1788.58,1941.78) -1788.58,1927.88 ; v2@-1799.56,1933.26 ccw(c-1788.58,1941.78) -1788.58,1927.88 ; -1549.52,1688.83 cw(c-1564.51,1673.84) v2@-1543.31,1673.84 ; -1549.52,1688.83 ccw(c-1534.54,1703.82) v2@-1534.54,1682.62 ; -1549.52,1688.83 cw(c-1564.51,1673.84) v2@-1543.31,1673.84 ; -1549.52,1688.83 ccw(c-1534.54,1703.82) v2@-1534.54,1682.62 ; -1549.52,1688.83 cw(c-1564.51,1673.84) v2@-1543.31,1673.84 ; -1549.52,1688.83 ccw(c-1534.54,1703.82) v2@-1534.54,1682.62 ; -1549.52,1688.83 cw(c-1564.51,1673.84) v2@-1543.31,1673.84 ; -1549.52,1688.83 ccw(c-1534.54,1703.82) v2@-1534.54,1682.62 ; -1549.52,1688.83 cw(c-1564.51,1673.84) v2@-1543.31,1673.84 ; -1549.52,1688.83 ccw(c-1534.54,1703.82) v2@-1534.54,1682.62 ; -1549.52,1688.83 ccw(c-1534.54,1703.82) v2@-1534.54,1682.62 ; -1549.52,1688.83 cw(c-1564.51,1673.84) v2@-1543.31,1673.84 ; -1549.52,1688.83 ccw(c-1534.54,1703.82) v2@-1534.54,1682.62 ; -1549.52,1688.83 cw(c-1564.51,1673.84) v2@-1543.31,1673.84 ; -1549.52,1688.83 ccw(c-1534.54,1703.82) v2@-1534.54,1682.62 ; -1549.52,1688.83 cw(c-1564.51,1673.84) v2@-1543.31,1673.84 ; -1549.52,1688.83 ccw(c-1534.54,1703.82) v2@-1534.54,1682.62 ; -1549.52,1688.83 cw(c-1564.51,1673.84) v2@-1543.31,1673.84
Z-STEP: U6.16 U8.43 | length 1870.8
  TopLayer w10: U6.16@-1860.62,1868.88 -1791.57,1868.88 v2(-1740.54,1817.84) ; U8.43@-1539.54,1360.84 v2(-1539.54,1617.84) ; -1755.52,1832.83 cw(c-1770.51,1817.84) v2@-1749.31,1817.84 ; -1755.52,1832.83 ccw(c-1740.54,1847.82) v2@-1740.54,1826.62 ; -1755.52,1832.83 cw(c-1770.51,1817.84) v2@-1749.31,1817.84 ; -1755.52,1832.83 ccw(c-1740.54,1847.82) v2@-1740.54,1826.62 ; -1755.52,1832.83 cw(c-1770.51,1817.84) v2@-1749.31,1817.84 ; -1755.52,1832.83 ccw(c-1740.54,1847.82) v2@-1740.54,1826.62 ; -1755.52,1832.83 cw(c-1770.51,1817.84) v2@-1749.31,1817.84 ; -1755.52,1832.83 ccw(c-1740.54,1847.82) v2@-1740.54,1826.62 ; -1755.52,1832.83 cw(c-1770.51,1817.84) v2@-1749.31,1817.84 ; -1755.52,1832.83 ccw(c-1740.54,1847.82) v2@-1740.54,1826.62 ; -1755.52,1832.83 ccw(c-1740.54,1847.82) v2@-1740.54,1826.62 ; -1755.52,1832.83 cw(c-1770.51,1817.84) v2@-1749.31,1817.84 ; -1755.52,1832.83 ccw(c-1740.54,1847.82) v2@-1740.54,1826.62 ; -1755.52,1832.83 cw(c-1770.51,1817.84) v2@-1749.31,1817.84 ; -1755.52,1832.83 ccw(c-1740.54,1847.82) v2@-1740.54,1826.62 ; -1755.52,1832.83 cw(c-1770.51,1817.84) v2@-1749.31,1817.84 ; -1755.52,1832.83 ccw(c-1740.54,1847.82) v2@-1740.54,1826.62 ; -1755.52,1832.83 cw(c-1770.51,1817.84) v2@-1749.31,1817.84 ; v2@-1545.74,1611.63 cw(c-1560.73,1596.65) -1539.54,1596.65 ; v2@-1545.74,1611.63 cw(c-1560.73,1596.65) -1539.54,1596.65 ; v2@-1545.74,1611.63 cw(c-1560.73,1596.65) -1539.54,1596.65 ; v2@-1545.74,1611.63 cw(c-1560.73,1596.65) -1539.54,1596.65 ; v2@-1545.74,1611.63 cw(c-1560.73,1596.65) -1539.54,1596.65 ; v2@-1545.74,1611.63 cw(c-1560.73,1596.65) -1539.54,1596.65 ; U8.43@-1542.36,1385.67 ccw(c-1549.19,1392.5) -1539.54,1392.5 ; U8.43@-1542.36,1385.67 ccw(c-1549.19,1392.5) -1539.54,1392.5 ; U8.43@-1542.36,1385.67 ccw(c-1549.19,1392.5) -1539.54,1392.5 ; U8.43@-1542.36,1385.67 ccw(c-1549.19,1392.5) -1539.54,1392.5 ; U8.43@-1542.36,1385.67 ccw(c-1549.19,1392.5) -1539.54,1392.5 ; U8.43@-1542.36,1385.67 ccw(c-1549.19,1392.5) -1539.54,1392.5 ; -1539.54,1392.5 ccw(c-1529.88,1392.5) U8.43@-1536.71,1385.67 ; -1539.54,1392.5 ccw(c-1529.88,1392.5) U8.43@-1536.71,1385.67 ; -1539.54,1392.5 ccw(c-1529.88,1392.5) U8.43@-1536.71,1385.67 ; -1539.54,1392.5 ccw(c-1529.88,1392.5) U8.43@-1536.71,1385.67 ; -1539.54,1392.5 ccw(c-1529.88,1392.5) U8.43@-1536.71,1385.67 ; -1539.54,1392.5 ccw(c-1529.88,1392.5) U8.43@-1536.71,1385.67 ; -1539.54,1596.65 cw(c-1518.34,1596.65) v2@-1533.33,1611.63 ; -1539.54,1596.65 cw(c-1518.34,1596.65) v2@-1533.33,1611.63 ; -1539.54,1596.65 cw(c-1518.34,1596.65) v2@-1533.33,1611.63 ; -1539.54,1596.65 cw(c-1518.34,1596.65) v2@-1533.33,1611.63 ; -1539.54,1596.65 cw(c-1518.34,1596.65) v2@-1533.33,1611.63 ; -1539.54,1596.65 cw(c-1518.34,1596.65) v2@-1533.33,1611.63
  BottomLayer w10: v2@-1739.54,1817.84 v2(-1539.54,1617.84) ; v2@-1740.54,1809.06 cw(c-1740.54,1785.45) -1723.84,1802.15 ; v2@-1740.54,1809.06 cw(c-1740.54,1785.45) -1723.84,1802.15 ; v2@-1740.54,1809.06 cw(c-1740.54,1785.45) -1723.84,1802.15 ; v2@-1740.54,1809.06 cw(c-1740.54,1785.45) -1723.84,1802.15 ; v2@-1740.54,1809.06 cw(c-1740.54,1785.45) -1723.84,1802.15 ; v2@-1740.54,1809.06 cw(c-1740.54,1785.45) -1723.84,1802.15 ; v2@-1740.54,1809.06 cw(c-1740.54,1785.45) -1723.84,1802.15 ; v2@-1740.54,1809.06 cw(c-1740.54,1785.45) -1723.84,1802.15 ; v2@-1740.54,1809.06 cw(c-1740.54,1785.45) -1723.84,1802.15 ; v2@-1731.76,1817.84 ccw(c-1712.97,1817.84) -1726.25,1804.56 ; v2@-1731.76,1817.84 ccw(c-1712.97,1817.84) -1726.25,1804.56 ; v2@-1731.76,1817.84 ccw(c-1712.97,1817.84) -1726.25,1804.56 ; v2@-1731.76,1817.84 ccw(c-1712.97,1817.84) -1726.25,1804.56 ; v2@-1731.76,1817.84 ccw(c-1712.97,1817.84) -1726.25,1804.56 ; v2@-1731.76,1817.84 ccw(c-1712.97,1817.84) -1726.25,1804.56 ; v2@-1731.76,1817.84 ccw(c-1712.97,1817.84) -1726.25,1804.56 ; v2@-1731.76,1817.84 ccw(c-1712.97,1817.84) -1726.25,1804.56 ; v2@-1731.76,1817.84 ccw(c-1712.97,1817.84) -1726.25,1804.56 ; -1554.52,1632.83 cw(c-1569.51,1617.84) v2@-1548.31,1617.84 ; -1554.52,1632.83 ccw(c-1539.54,1647.82) v2@-1539.54,1626.62 ; -1554.52,1632.83 cw(c-1569.51,1617.84) v2@-1548.31,1617.84 ; -1554.52,1632.83 ccw(c-1539.54,1647.82) v2@-1539.54,1626.62 ; -1554.52,1632.83 cw(c-1569.51,1617.84) v2@-1548.31,1617.84 ; -1554.52,1632.83 ccw(c-1539.54,1647.82) v2@-1539.54,1626.62 ; -1554.52,1632.83 cw(c-1569.51,1617.84) v2@-1548.31,1617.84 ; -1554.52,1632.83 ccw(c-1539.54,1647.82) v2@-1539.54,1626.62 ; -1554.52,1632.83 cw(c-1569.51,1617.84) v2@-1548.31,1617.84 ; -1554.52,1632.83 ccw(c-1539.54,1647.82) v2@-1539.54,1626.62 ; -1554.52,1632.83 ccw(c-1539.54,1647.82) v2@-1539.54,1626.62 ; -1554.52,1632.83 cw(c-1569.51,1617.84) v2@-1548.31,1617.84 ; -1554.52,1632.83 ccw(c-1539.54,1647.82) v2@-1539.54,1626.62 ; -1554.52,1632.83 cw(c-1569.51,1617.84) v2@-1548.31,1617.84 ; -1554.52,1632.83 ccw(c-1539.54,1647.82) v2@-1539.54,1626.62 ; -1554.52,1632.83 cw(c-1569.51,1617.84) v2@-1548.31,1617.84 ; -1554.52,1632.83 ccw(c-1539.54,1647.82) v2@-1539.54,1626.62 ; -1554.52,1632.83 cw(c-1569.51,1617.84) v2@-1548.31,1617.84
Z-STOP: C7.1 R3.1 U8.23 Z-STOP.1 | length 2159.9
  TopLayer w10: U8.23@-1187.54,977.84 -1187.54,614.84 -1155.54,582.84 -1033.54,582.84 -1003.54,552.84 R3.1@-1003.54,527.84 ; C7.1@-1017.68,431.98 ccw(c-1051.82,466.13) -1003.54,466.13 ; R3.1@-1010.11,535.38 ccw(c-1022.73,549.84) -1003.54,549.84 ccw(c-984.34,549.84) R3.1@-996.96,535.38 ; U8.23@-1190.36,975.01 cw(c-1197.19,968.19) -1187.54,968.19 ; U8.23@-1190.36,975.01 cw(c-1197.19,968.19) -1187.54,968.19 ; U8.23@-1190.36,975.01 cw(c-1197.19,968.19) -1187.54,968.19 ; U8.23@-1190.36,975.01 cw(c-1197.19,968.19) -1187.54,968.19 ; U8.23@-1190.36,975.01 cw(c-1197.19,968.19) -1187.54,968.19 ; U8.23@-1190.36,975.01 cw(c-1197.19,968.19) -1187.54,968.19 ; U8.23@-1190.36,975.01 cw(c-1197.19,968.19) -1187.54,968.19 ; U8.23@-1190.36,975.01 cw(c-1197.19,968.19) -1187.54,968.19 ; U8.23@-1190.36,975.01 cw(c-1197.19,968.19) -1187.54,968.19 ; -1187.54,968.19 cw(c-1177.88,968.19) U8.23@-1184.71,975.01 ; -1187.54,968.19 cw(c-1177.88,968.19) U8.23@-1184.71,975.01 ; -1187.54,968.19 cw(c-1177.88,968.19) U8.23@-1184.71,975.01 ; -1187.54,968.19 cw(c-1177.88,968.19) U8.23@-1184.71,975.01 ; -1187.54,968.19 cw(c-1177.88,968.19) U8.23@-1184.71,975.01 ; -1187.54,968.19 cw(c-1177.88,968.19) U8.23@-1184.71,975.01 ; -1187.54,968.19 cw(c-1177.88,968.19) U8.23@-1184.71,975.01 ; -1187.54,968.19 cw(c-1177.88,968.19) U8.23@-1184.71,975.01 ; -1187.54,968.19 cw(c-1177.88,968.19) U8.23@-1184.71,975.01 ; R3.1@-1010.61,534.91 ccw(c-1027.68,551.98) -1003.54,551.98 ; R3.1@-1010.61,534.91 ccw(c-1027.68,551.98) -1003.54,551.98 ; R3.1@-1010.61,534.91 ccw(c-1027.68,551.98) -1003.54,551.98 ; R3.1@-1010.61,534.91 ccw(c-1027.68,551.98) -1003.54,551.98 ; R3.1@-1010.61,534.91 ccw(c-1027.68,551.98) -1003.54,551.98 ; -1003.54,551.98 ccw(c-979.39,551.98) R3.1@-996.46,534.91 ; -1003.54,551.98 ccw(c-979.39,551.98) R3.1@-996.46,534.91 ; -1003.54,551.98 ccw(c-979.39,551.98) R3.1@-996.46,534.91 ; -1003.54,551.98 ccw(c-979.39,551.98) R3.1@-996.46,534.91 ; -1003.54,551.98 ccw(c-979.39,551.98) R3.1@-996.46,534.91
  TopLayer w20: C7.1@-1014.14,428.45 ccw(c-1039.75,454.06) -1003.54,454.06 cw(c-1039.75,454.06) C7.1@-1014.14,428.45
  TopLayer w25: R3.1@-1003.54,527.84 C7.1@-1003.54,417.84 -1003.54,326.84 -967.54,290.84 Z-STOP.1@-967.54,150.84 ; C7.1@-1012.37,426.68 ccw(c-1033.71,448.02) -1003.54,448.02 ; C7.1@-1012.37,426.68 ccw(c-1033.71,448.02) -1003.54,448.02 ; C7.1@-1012.37,426.68 ccw(c-1033.71,448.02) -1003.54,448.02 ; C7.1@-1012.37,426.68 ccw(c-1033.71,448.02) -1003.54,448.02 ; C7.1@-1012.37,426.68 ccw(c-1033.71,448.02) -1003.54,448.02 ; C7.1@-1012.37,426.68 ccw(c-1033.71,448.02) -1003.54,448.02 ; -1003.54,448.02 ccw(c-973.36,448.02) C7.1@-994.7,426.68 ; -1003.54,448.02 ccw(c-973.36,448.02) C7.1@-994.7,426.68 ; -1003.54,448.02 ccw(c-973.36,448.02) C7.1@-994.7,426.68 ; -1003.54,448.02 ccw(c-973.36,448.02) C7.1@-994.7,426.68 ; -1003.54,448.02 ccw(c-973.36,448.02) C7.1@-994.7,426.68 ; -1003.54,448.02 ccw(c-973.36,448.02) C7.1@-994.7,426.68 ; Z-STOP.1@-980.97,164.27 ccw(c-1013.4,196.7) -967.54,196.7 ; Z-STOP.1@-980.97,164.27 ccw(c-1013.4,196.7) -967.54,196.7 ; Z-STOP.1@-980.97,164.27 ccw(c-1013.4,196.7) -967.54,196.7 ; Z-STOP.1@-980.97,164.27 ccw(c-1013.4,196.7) -967.54,196.7 ; Z-STOP.1@-980.97,164.27 ccw(c-1013.4,196.7) -967.54,196.7 ; Z-STOP.1@-980.97,164.27 ccw(c-1013.4,196.7) -967.54,196.7 ; -967.54,196.7 ccw(c-921.67,196.7) Z-STOP.1@-954.1,164.27 ; -967.54,196.7 ccw(c-921.67,196.7) Z-STOP.1@-954.1,164.27 ; -967.54,196.7 ccw(c-921.67,196.7) Z-STOP.1@-954.1,164.27 ; -967.54,196.7 ccw(c-921.67,196.7) Z-STOP.1@-954.1,164.27 ; -967.54,196.7 ccw(c-921.67,196.7) Z-STOP.1@-954.1,164.27 ; -967.54,196.7 ccw(c-921.67,196.7) Z-STOP.1@-954.1,164.27